# EAGLE board ION-KB RGB LED Panelized (EAGLE 6.5.0)
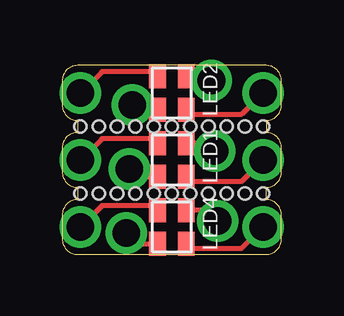
[diagram p0: board, top side]

Size 9.14 x 7.87 mm. Coordinates in mm from the lower left corner, seen from the top.
Outline: 0,1.65 0,0.64 arc90 0.64,0 8.51,0 arc90 9.14,0.64 9.14,1.65 arc90 8.51,2.29 8.51,2.79 arc90 9.14,3.43 9.14,4.45 arc90 8.51,5.08 8.51,5.59 arc90 9.14,6.22 9.14,7.24 arc90 8.51,7.87 0.64,7.87 arc90 0,7.24 0,6.22 arc90 0.64,5.59 0.64,5.08 arc90 0,4.45 0,3.43 arc90 0.64,2.79 0.64,2.29 arc90 0,1.65
Copper layers (1*16): Top 0.035mm / dielectric 1.5mm / Bottom 0.035mm
Design rules "default": minimum track width 10mil, minimum drill 24mil, track to track 8mil, track to pad 8mil, pad to pad 8mil, via to via 8mil, smd to smd 8mil, copper to edge 40mil, drill to drill 8mil, minimum pad ring 10mil, minimum via ring 8mil, stop-mask expansion 4mil, vias tented up to drill 0mil, thermal gap 10mil
Holes 0.51 mm at 4.57,2.54 3.81,2.54 5.33,2.54 4.57,5.33 3.81,5.33 5.33,5.33 3.05,2.54 2.29,2.54 1.52,2.54 0.76,2.54 3.05,5.33 2.29,5.33 1.52,5.33 0.76,5.33 8.38,5.33 7.62,5.33 6.86,5.33 6.1,5.33 8.38,2.54 7.62,2.54 6.86,2.54 6.1,2.54

## Footprints (pad centres in the part's own frame; a part is rotated, then mirrored left to right if it is on the bottom)
LED-SMD-RGB = smd 1 x 0.7: A 0.7,-0.6; B 0.7,0.6; G -0.7,-0.6; R -0.7,0.6

## Placement (x,y rotation side)
LED1  LED-RGB-CASMD  [LED-SMD-RGB]  4.57,3.94 270 top
LED2  LED-RGB-CASMD  [LED-SMD-RGB]  4.57,6.73 270 top
LED4  LED-RGB-CASMD  [LED-SMD-RGB]  4.57,1.14 270 top

## Library data of the parts
LED1 LED2 LED4 = Jordi

## Nets
A: LED4.A
A1: LED1.A
A2: LED2.A
B: LED4.B
B1: LED1.B
B2: LED2.B
G: LED4.G
G1: LED1.G
G2: LED2.G
R: LED4.R
R1: LED1.R
R2: LED2.R

## Tracks (layer width: path | path; a pad name or v marks a point on that pad's centre or on a via)
A  (via drill 1.15 pad 1.27)
  Top 0.203: v2.67,0.89 3.11,0.44 LED4.A
A1  (via drill 1.15 pad 1.27)
  Top 0.203: v2.79,3.56 3.11,3.24 LED1.A
A2  (via drill 1.15 pad 1.27)
  Top 0.203: v2.92,6.22 3.11,6.03 LED2.A
B  (via drill 1.15 pad 1.27)
  Top 0.203: LED4.B 5.36,0.25 7.49,0.25 v8.38,1.14
B1  (via drill 1.15 pad 1.27)
  Top 0.203: LED1.B 5.36,3.05 7.49,3.05 v8.38,3.94
B2  (via drill 1.15 pad 1.27)
  Top 0.203: LED2.B 5.36,5.84 7.49,5.84 v8.38,6.73
G  (via drill 1.15 pad 1.27)
  Top 0.203: LED4.G 3.78,2.03 1.65,2.03 v0.76,1.14
G1  (via drill 1.15 pad 1.27)
  Top 0.203: LED1.G 3.78,4.83 1.65,4.83 v0.76,3.94
G2  (via drill 1.15 pad 1.27)
  Top 0.203: LED2.G 3.78,7.62 1.65,7.62 v0.76,6.73
R  (via drill 1.15 pad 1.27)
  Top 0.203: v6.48,1.4 6.03,1.84 LED4.R
R1  (via drill 1.15 pad 1.27)
  Top 0.203: v6.35,4.32 6.03,4.64 LED1.R
R2  (via drill 1.15 pad 1.27)
  Top 0.203: v6.22,7.24 6.03,7.43 LED2.R

## Text on the board
_bsilk: 3 | 2 | 1